# EAGLE board OptolinkDuo2 (EAGLE 7.5.0)
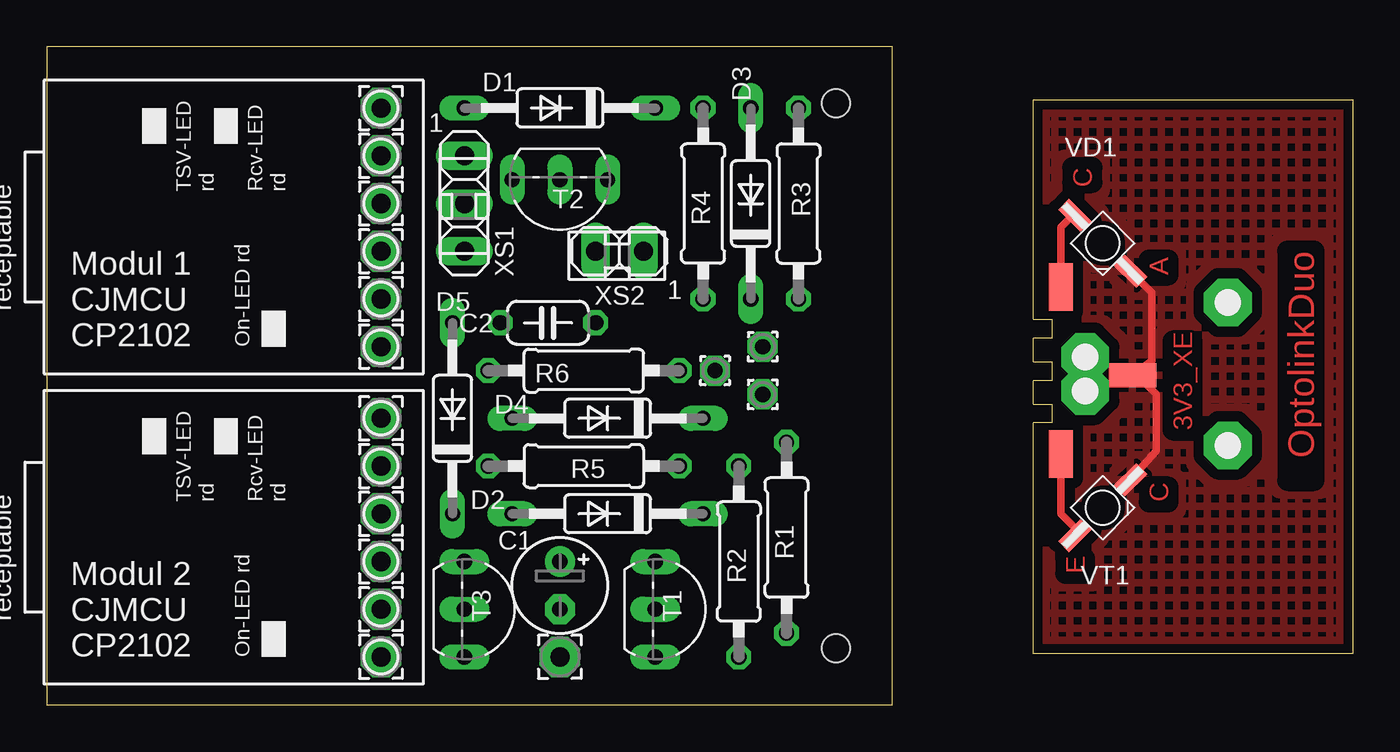
[diagram p0: board, top side]
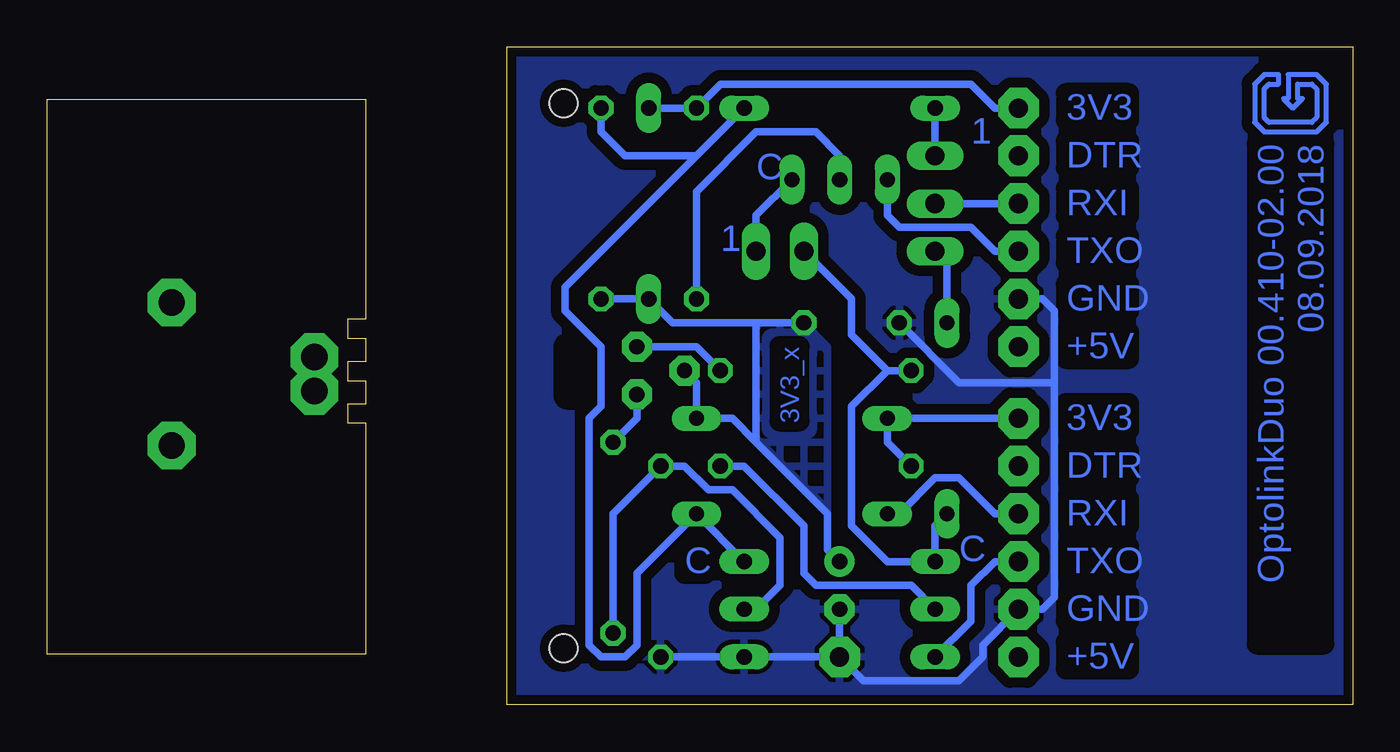
[diagram p1: board, bottom side, seen from below]

Size 69.5 x 35 mm. Coordinates in mm from the lower left corner, seen from the top.
Outline: 0,0 45,0 45,35 0,35 0,0
Outline: 69.5,2.7 52.5,2.7 52.5,15 53.5,15 53.5,16 52.5,16 52.5,17.25 53.5,17.25 53.5,18.25 52.5,18.25 52.5,19.5 53.5,19.5 53.5,20.5 52.5,20.5 52.5,32.2 69.5,32.2 69.5,2.7
Copper layers (1*16): Top 0.035mm / dielectric 1.5mm / Bottom 0.035mm
Design rules "MyRules": minimum track width 16mil, minimum drill 20mil, track to track 22mil, track to pad 22mil, pad to pad 22mil, via to via 22mil, smd to smd 8mil, copper to edge 20mil, drill to drill 8mil, minimum pad ring 10mil, minimum via ring 8mil, stop-mask expansion 4mil, vias tented up to drill 0mil, thermal gap 10mil
Holes 1.5 mm at 42,32 42,3
bRestrict: 4 lines

## Footprints (pad centres in the part's own frame; a part is rotated, then mirrored left to right if it is on the bottom)
V-PAC = drill 1.4 pad 2.54 octagon: H1 3.2,5.8; H2 10.8,5.8; H3 6.1,-1.8; H4 7.9,-1.8
E2,5-5 = drill 0.813 pad 1.6: + -1.27,0 | drill 0.813 pad 1.6 octagon: - 1.27,0
C050-024X044 = drill 0.813 octagon: 1 -2.54,0; 2 2.54,0
DO35-10 = drill 0.813 long: A 5.08,0; C -5.08,0
2,15/1,0 = drill 1.016 pad 2.159 octagon: 1 0,0
1,6/0,8 = drill 0.813 pad 1.6 octagon: 1 0,0
SMD1,27-2,54 = smd 1.27 x 2.54: 1 0,0
0207/10 = drill 0.813 octagon: 1 -5.08,0; 2 5.08,0
TO92-CBE = drill 0.813 long: B 0,0; C -2.54,0; E 2.54,0
VISHAY_GULLWING(R) = smd 1.676 x 0.813: COLLECTOR -2.1,0; EMITTER 2.1,0
1X03 = drill 1.016 long: 1 -2.54,0; 2 0,0; 3 2.54,0
1X02 = drill 1.016 long: 1 -1.27,0; 2 1.27,0

## Placement (x,y rotation side)
3V3_XE  V  [V-PAC]  57.06,24.6 270 top
C1  22µ  [E2,5-5]  27.3,6.35 270 top
C2  47n  [C050-024X044]  26.67,20.32 180 top
D1  BAT42  [DO35-10]  27.3,31.75 180 top
D2  BAT42  [DO35-10]  29.84,10.16 180 top
D3  BAT42  [DO35-10]  37.47,26.67 90 top
D4  BAT42  [DO35-10]  29.84,15.24 180 top
D5  BAT42  [DO35-10]  21.59,15.24 90 top
GND_PAD  GND  [2,15/1,0]  27.3,2.54 0 top
J1  [JUMP]  30.34,23.89 270 top
J2  [JUMP]  22.2,26.53 0 top
M1_PAD1  3V3  [2,15/1,0]  17.78,31.75 0 top
M1_PAD2  DTR  [2,15/1,0]  17.78,29.21 0 top
M1_PAD3  RXI  [2,15/1,0]  17.78,26.67 0 top
M1_PAD4  TXO  [2,15/1,0]  17.78,24.13 0 top
M1_PAD5  GND  [2,15/1,0]  17.78,21.59 0 top
M1_PAD6  +5V  [2,15/1,0]  17.78,19.05 0 top
M2_PAD1  3V3  [2,15/1,0]  17.78,15.24 0 top
M2_PAD2  DTR  [2,15/1,0]  17.78,12.7 0 top
M2_PAD3  RXI  [2,15/1,0]  17.78,10.16 0 top
M2_PAD4  TXO  [2,15/1,0]  17.78,7.62 0 top
M2_PAD5  GND  [2,15/1,0]  17.78,5.08 0 top
M2_PAD6  +5V  [2,15/1,0]  17.78,2.54 0 top
PAD1  3V3_X  [1,6/0,8]  35.56,17.78 0 top
PAD2  IRED_K  [1,6/0,8]  38.1,19.05 0 top
PAD3  PhT_E  [1,6/0,8]  38.1,16.51 0 top
PAD11  3V3_x  [SMD1,27-2,54]  57.78,17.53 270 top
PAD12  IRED_K  [SMD1,27-2,54]  53.98,22.23 180 top
PAD13  PhT_E  [SMD1,27-2,54]  53.98,13.34 180 top
R1  1,2k  [0207/10]  39.37,8.89 90 top
R2  10k  [0207/10]  36.83,7.62 90 top
R3  4,7k  [0207/10]  40.01,26.67 270 top
R4  2,7k  [0207/10]  34.92,26.67 90 top
R5  2,7k  [0207/10]  28.57,12.7 180 top
R6  270  [0207/10]  28.57,17.78 0 top
T1  BC547B  [TO92-CBE]  32.38,5.08 270 top
T2  BC547B  [TO92-CBE]  27.3,27.94 180 top
T3  BC547B  [TO92-CBE]  22.23,5.08 270 top
U$4  [!G-SIGN_B]  3.17,31.75 270 top
VD1  VSMY2850RG  [VISHAY_GULLWING(R)]  56.2,24.55 135 top
VT1  VEMT2000X01  [VISHAY_GULLWING(R)]  56.2,10.48 225 top
XS1  [1X03]  22.23,26.67 270 top
XS2  [1X02]  30.48,24.13 180 top

## Library data of the parts
3V3_XE U$4 = !My-Lib
C1 C2 R1-R6 = rcl
D1-D5 = diode
GND_PAD M1_PAD1-M1_PAD6 M2_PAD1-M2_PAD6 PAD1-PAD3 PAD11-PAD13 = wirepad
J1 J2 = jumper
T1-T3 = transistor
VD1 VT1 = vishay
XS1 XS2 = pinhead

## Nets
3V3_1: D3.A M1_PAD1.1 R4.2
3V3_2: D4.A M2_PAD1.1 R5.2
3V3_X: C1.+ C2.1 D3.C D4.C PAD1.1 R3.2
3V3_XE: PAD11.1 VD1.COLLECTOR VT1.COLLECTOR
GND: C1.- C2.2 GND_PAD.1 M1_PAD5.1 M2_PAD5.1 R2.1 T1.E
N$2: T2.C XS2.1
N$3: D2.A M2_PAD3.1
N$4: D1.A XS1.1
N$5: D5.C R6.1 T3.C XS2.2
N$6: PAD12.1 VD1.EMITTER
N$8: PAD13.1 VT1.EMITTER
N$11: D5.A XS1.3
N$14: PAD3.1 R1.2
N$16: R1.1 R2.2 T1.B
N$17: D1.C D2.C R3.1 T1.C
N$18: M1_PAD3.1 XS1.2
N$21: R5.1 T3.B
N$22: R4.1 T2.B
N$23: PAD2.1 R6.2
TXO_1: M1_PAD4.1 T2.E
TXO_2: M2_PAD4.1 T3.E

## Tracks (layer width: path | path; a pad name or v marks a point on that pad's centre or on a via)
3V3_1
  Bottom 0.406: D3.A R4.2 33.66,33.02 20.32,33.02 19.05,31.75 M1_PAD1.1
3V3_2
  Bottom 0.406: M2_PAD1.1 D4.A 24.77,13.97 R5.2
3V3_X
  Bottom 0.406: C1.+ 27.94,8.26 27.94,10.16 31.75,13.97 | R3.2 D3.C 36.2,20.32 31.75,20.32 | 31.75,13.97 33.02,15.24 D4.C 34.92,17.14 PAD1.1 | 31.75,13.97 31.75,20.32 | C2.1 31.75,20.32
  pour Bottom (no thermals, hatched): 27.94,10.16 27.94,19.05 29.21,20.32 31.75,20.32 31.75,13.97
3V3_XE
  Top 0.406: VT1.COLLECTOR 59.05,13.52 59.05,16.51 58.08,17.48 PAD11.1 58.83,18.3 58.83,21.93 VD1.COLLECTOR
  pour Top (hatched): 52.7,31.75 69.22,31.75 69.22,3.17 52.7,3.17
GND
  Bottom 0.406: GND_PAD.1 T1.E R2.1 | C1.- GND_PAD.1 | GND_PAD.1 26.04,1.27 20.95,1.27 19.68,2.54 19.68,3.17 M2_PAD5.1 16.51,5.08 15.88,5.71 15.88,17.14 | M1_PAD5.1 16.51,21.59 15.88,20.95 15.88,17.14 | C2.2 20.95,17.14 15.88,17.14
  pour Bottom: 45.09,34.92 0,34.92 0,0 45.09,0
N$2
  Bottom 0.406: XS2.1 31.75,26.04 T2.C
N$3
  Bottom 0.406: M2_PAD3.1 19.05,10.16 20.95,12.06 22.23,12.06 24.13,10.16 D2.A
N$4
  Bottom 0.406: XS1.1 D1.A
N$5
  Bottom 0.406: D5.C 22.23,9.53 T3.C 24.77,7.62 26.67,9.53 26.67,15.88 24.77,17.78 | R6.1 24.77,17.78 | 24.77,17.78 26.67,19.68 26.67,21.59 XS2.2
N$6
  Top 0.406: PAD12.1 53.98,25.4 54.61,26.04 VD1.EMITTER
N$8
  Top 0.406: PAD13.1 53.98,10.16 54.72,9.42 VT1.EMITTER
N$11
  Bottom 0.406: D5.A 21.59,23.5 XS1.3
N$14
  Bottom 0.406: R1.2 38.1,15.24 PAD3.1
N$16
  Bottom 0.406: R1.1 39.37,10.16 R2.2 36.2,12.7 35.56,12.7 34.29,11.43 33.02,11.43 30.48,8.89 30.48,8.26 30.48,6.35 31.75,5.08 T1.B
N$17
  Bottom 0.406: 34.92,29.21 D1.C | R3.1 40.01,30.48 38.73,29.21 34.92,29.21 | 34.92,29.21 41.91,22.23 41.91,20.95 40.01,19.05 40.01,15.88 40.64,15.24 40.64,3.17 40.01,2.54 38.73,2.54 38.1,3.17 38.1,6.99 D2.C T1.C
N$18
  Bottom 0.406: M1_PAD3.1 XS1.2
N$21
  Bottom 0.406: T3.B 23.5,6.35 28.57,6.35 29.21,6.99 29.21,9.53 32.38,12.7 R5.1
N$22
  Bottom 0.406: R4.1 34.92,27.3 31.75,30.48 28.57,30.48 27.3,29.21 T2.B
N$23
  Bottom 0.406: R6.2 34.92,19.05 PAD2.1
TXO_1
  Bottom 0.406: T2.E 24.77,26.04 24.13,25.4 20.32,25.4 19.05,24.13 M1_PAD4.1
TXO_2
  Bottom 0.406: M2_PAD4.1 19.05,7.62 20.32,6.35 20.32,4.45 T3.E

## Text on the board
Top: C | OptolinkDuo | A | 3V3_XE | C | E
Bottom: 3V3 | OptolinkDuo 00.410-02.00 / 08.09.2018 | 1 | DTR | C | RXI | 1 | TXO | GND | 3V3_x | +5V | 3V3 | DTR | RXI | C | TXO | C | GND | +5V
tPlace: 1 | TSV-LED / rd | Rcv-LED / rd | 1 | USB2-micro-B / receptable | Modul 1 / CJMCU / CP2102 | On-LED rd | TSV-LED / rd | Rcv-LED / rd | USB2-micro-B / receptable | Modul 2 / CJMCU / CP2102 | On-LED rd
Mechanic: Gefüllte Kreise deuten die / Öffnungen für Optolink im / Heizungsgerät an. / IRED und Fototransistor / sind diesbezüglich / asymmetrisch angeordnet. / Schraffierte Kupferfläche / soll andeuten, dass sie nicht / auf GND, sondern auf 3,3V- / Potenzial liegt.
Ingenieurbuero: Leiterzugseite / oben | Leiterzugseite unten | Optolink Duo 00.410-02.00